# Altium PCB di2c.PcbDoc
Units mil, origin at the board's own origin, x right, y up, seen from the top; angles counter-clockwise.
Board outline 1945 x 875 mil, 2 copper layers (Top Layer, Bottom Layer); 28 components, 18 nets, 90 pads, 13 vias.
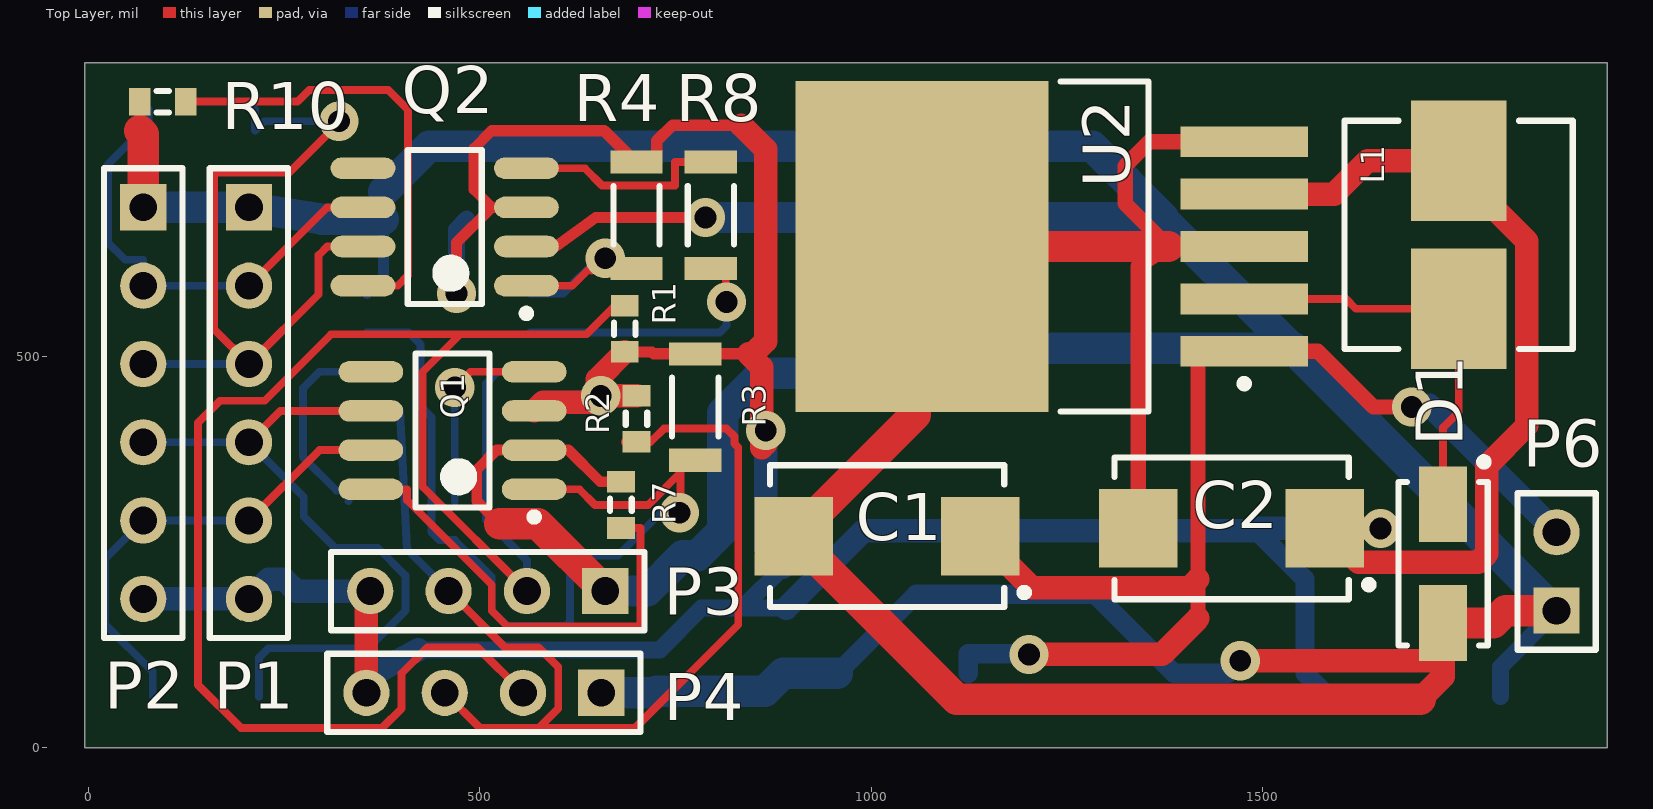
[diagram p0: Top Layer view]
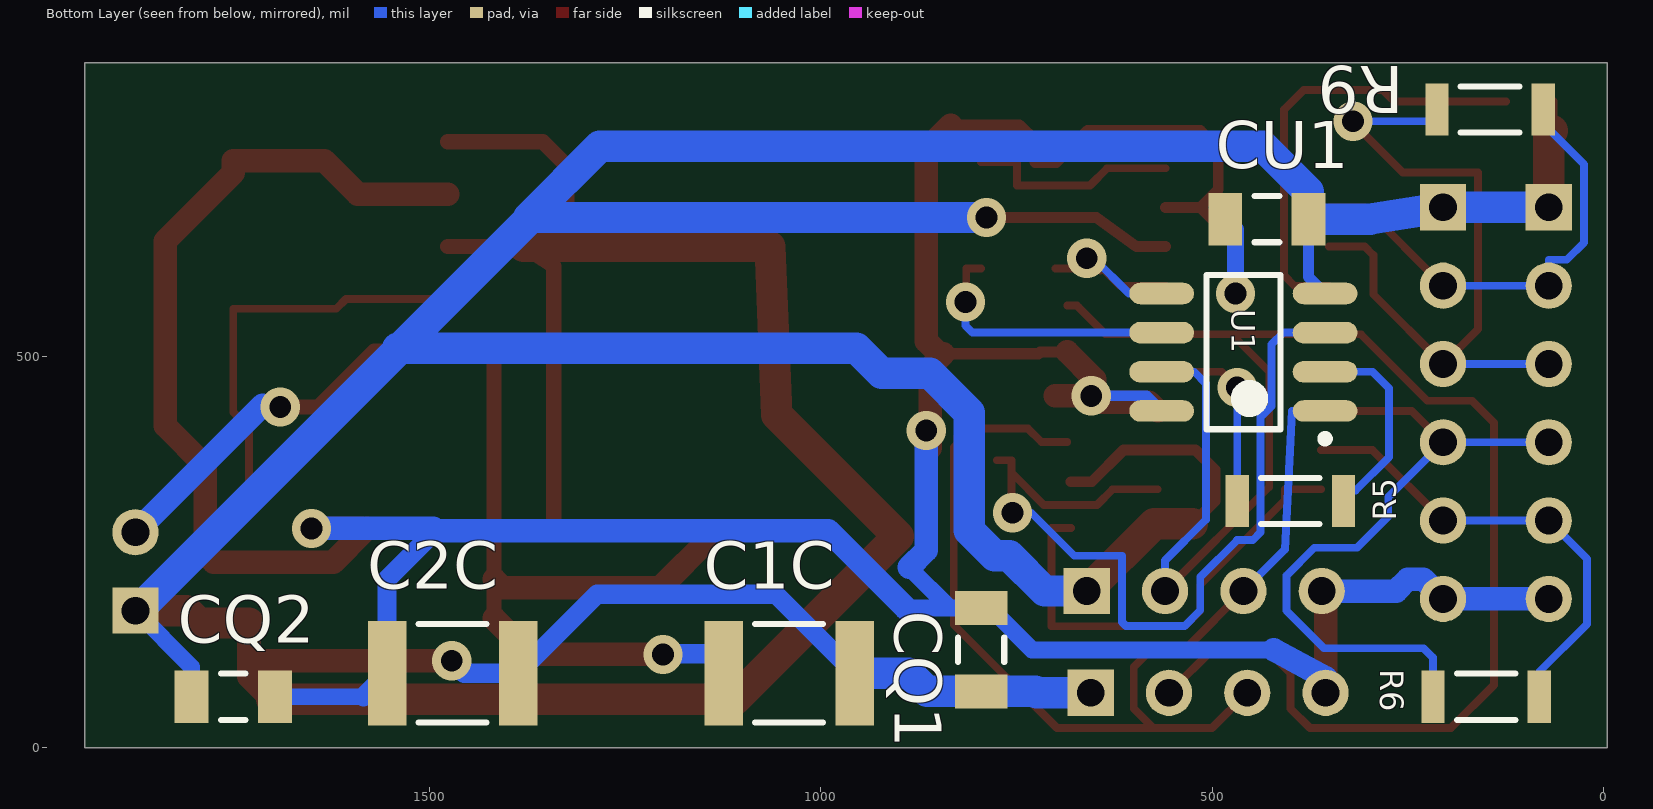
[diagram p1: Bottom Layer view, seen from below]

## Layer stack, top to bottom
Top Solder: solder mask 0.4, Solder Resist, Dk 3.5
Top Layer: signal copper 1.4
Dielectric 1: dielectric 12.6, FR-4, Dk 4.8
Bottom Layer: signal copper 1.4
Bottom Solder: solder mask 0.4, Solder Resist, Dk 3.5

## Board outline
-5,0 -5,875 1940,875 1940,0

## Design rules (kind name [scope] priority, off if disabled: settings)
Clearance [All] p1: gap=10
PolygonConnect [All] p1: connectstyle=Relief reliefconductorwidth=10 reliefentries=4 polygonreliefangle="90 Angle" airgapwidth=10
RoutingVias [All] p1: holewidth=28 width=50 viastyle="Through Hole" minholewidth=28 minwidth=50 maxholewidth=28 maxwidth=50
SilkToSolderMaskClearance SilkToSolderMaskClearance_1 [IsPad vs HasFootprint('J1-0603')] p1: minsilkscreentomaskgap=3.5 clearancetoexposedcopper=TRUE
SilkToSolderMaskClearance [IsPad] p2: minsilkscreentomaskgap=10 clearancetoexposedcopper=TRUE
SolderMaskExpansion [All] p1: expansion=4
Width Width_4 [InNet('12V')] p1: maxlimit=60 minlimit=10 preferedwidth=30 minimp=50.000000 maximp=50.000000 favimp=50.000000
Width Width_3 [InNet('5V')] p2: maxlimit=60 minlimit=10 preferedwidth=30 minimp=50.000000 maximp=50.000000 favimp=50.000000
Width Width_2 [InNet('GND')] p3: maxlimit=50 minlimit=10 preferedwidth=40 minimp=50.000000 maximp=50.000000 favimp=50.000000
Width [All] p4: maxlimit=10 minlimit=10 preferedwidth=10
Width Width_1 [InNetClass('hc')] p5: maxlimit=30 minlimit=10 preferedwidth=20 minimp=50.000000 maximp=50.000000 favimp=50.000000
29 further rules are at their usual default settings.

## Classes and differential pairs
net class hc: 5V NetD1_1 NetP1_2 NetP1_3 NetP1_4 NetP1_5 NetQ1_1 NetQ1_4 NetQ2_1 NetQ2_4 NetR5_2 NetR8_2

## Components (designator, comment, footprint, x,y, rotation, side; value= is the part's Value field where it differs from the comment)
C1 "Cap Pol1" C7343 1020,270 r180 top
C1C "Cap Semi" C1812 1040,95 r0 bottom
C2 "Cap Pol1" C7343 1460,280 r180 top
C2C "Cap Semi" C1812 1470,95 r0 bottom
CQ1 "Cap Semi" C1206 795,125 r90 bottom
CQ2 "Cap Semi" C1206 1750,65 r180 bottom
CU1 "Cap Semi" C1206 430,675 r0 bottom
D1 "1N5819" DO214AC 1730,235 r270 top
L1 "Inductor" CD74R 1750,655 r90 top
P1 "Header 6" HDR1X6 205,690 r270 top
P2 "Header 6" HDR1X6 70,690 r270 top
P3 "Header 4" HDR1X4 660,200 r180 top
P4 "Header 4" HDR1X4 655,70 r180 top
P6 "Header 2" HDR1X2 1875,175 r90 top
Q1 "PCA82C251" SOIC150-8_M 465,405 r180 top
Q2 "PCA82C251" SOIC150-8_M 455,665 r180 top
R1 "Res3" J1-0603 685,535 r270 top
R2 "Res3" J1-0603 700,420 r90 top
R3 "270" R1206 775,435 r90 top
R4 "270" R1206 700,680 r90 top
R5 "60" R1206 400,315 r180 bottom
R6 "120" R1206 150,65 r180 bottom
R7 "Res3" J1-0603 680,310 r90 top
R8 "60" R1206 795,680 r270 top
R9 "120" R1206 145,815 r0 bottom
R10 "Res3" J1-0603 95,825 r180 top
U1 "PCA9600D" SOIC150-8_M 460,505 r0 bottom
U2 "LM2575" KTT 1230,640 r180 top

## Footprints (in the part's own frame and the unit in brackets; to place one, negate y for a bottom-side part, rotate by r counter-clockwise, add the part's x,y. Pads: shape width x height; smd on the part's side, far side on the other; paste and mask are expansions set on the pad)
C1206 [mm] "Chip Capacitor, Body 3.2x1.6mm, IPC High Density"
  rect 1.1x1.7 smd: 1(-1.35,0) 2(1.35,0)
  silkscreen extent -0.4,-0.75 0.4,0.75, body extent -1.7,-0.9 1.7,0.9, height 1.3
C1812 [mm] "Chip Capacitor, 2-Leads, Body 4.50x3.20mm, IPC Medium Density"
  rect 1.25x3.4 smd: 1(-2.125,0) 2(2.125,0)
  silkscreen extent -1.1,-1.6 1.1,1.6, body extent -2.4,-1.7 2.4,1.7, height 3
C7343 [mm]
  rect 2.55x2.55 smd: 1(-3.025,0) 2(3.025,0)
  silkscreen extent -4.58,-2.3 3.8,2.3, body extent -3.8,-2.3 3.8,2.3, height 4.3
CD74R [mm]
  rect 3.9x3.1 smd: 1(-2.4,0) 2(2.4,0)
  silkscreen extent -3.7,-3.7 3.7,3.7, body extent -3.7,-3.7 3.7,3.7, height 4
DO214AC [mm] "Molded Diode, 2-Leads, Body 5.00x2.70mm, IPC Medium Density"
  rect 2.45x1.55 smd: 1(-1.925,0) 2(1.925,0)
  silkscreen extent -3.42,-1.45 2.65,1.45, body extent -2.65,-1.45 2.65,1.45, height 2.45
HDR1X2 [mm] "Connector; Header; 2 Position"
  rect 1.5x1.5 hole 0.9: 1(0,0)
  round 1.5 hole 0.9: 2(2.54,0)
  silkscreen extent -1.27,-1.27 3.81,1.27
HDR1X4 [mm] "Connector; Header; 4 Position"
  rect 1.5x1.5 hole 0.9: 1(0,0)
  round 1.5 hole 0.9: 2(2.54,0) 3(5.08,0) 4(7.62,0)
  silkscreen extent -1.27,-1.27 8.89,1.27
HDR1X6 [mm] "Connector; Header; 6 Position"
  rect 1.5x1.5 hole 0.9: 1(0,0)
  round 1.5 hole 0.9: 2(2.54,0) 3(5.08,0) 4(7.62,0) 5(10.16,0) 6(12.7,0)
  silkscreen extent -1.27,-1.27 13.97,1.27
J1-0603 [mm] "Chip Resistor, Body 1.6x0.8mm, IPC High Density"
  rect 0.7x0.9 smd: 1(-0.75,0) 2(0.75,0)
  silkscreen extent -0.2,-0.35 0.2,0.35, body extent -0.85,-0.48 0.85,0.48, height 0.9
KTT [mm] "D2-PAK, 6-Pads, Body 7.93x8.69mm (max), IPC Medium Density"
  rect 4.15x1 smd: 1(-6.25,3.4) 2(-6.25,1.7) 3(-6.25,0) 4(-6.25,-1.7) 5(-6.25,-3.4)
  rect 8.2x10.75 smd: 6(4.2,0)
  silkscreen extent -6.38,-5.35 -0.3,5.35, body extent -3.15,-5.32 6.5,5.33, height 4.83
R1206 [mm] "Chip Resistor, 2-Leads, Body 3.20x1.60mm, IPC Medium Density"
  rect 0.75x1.7 smd: 1(-1.725,0) 2(1.725,0)
  silkscreen extent -0.95,-0.75 0.95,0.75, body extent -1.6,-0.8 1.6,0.8, height 0.6
SOIC150-8_M [mm] "8-Pin Plastic Narrow Body Small Outline Integrated Circuit 1.27 mm Pitch, IPC Low Density"
  oval 2.1x0.7 smd: 1(-2.65,1.905) 2(-2.65,0.635) 3(-2.65,-0.635) 4(-2.65,-1.905) 5(2.65,-1.905) 6(2.65,-0.635) 7(2.65,0.635) 8(2.65,1.905)
  silkscreen extent -2.78,-2.5 1.2,2.93, body extent -2,-2.5 2,2.5, height 1.76

## Part data
C1 C2: "Polarized Capacitor (Radial)"
C1C C2C CQ1 CQ2 CU1: "Capacitor (Semiconductor SIM Model)"
D1: library part "D Zener", "Zener Diode"
P1 P2: "Header, 6-Pin"
P3 P4: "Header, 4-Pin"
P6: "Header, 2-Pin"
R1 R2 R7 R10: "Resistor"
R3 R4 R5 R6 R8 R9: library part Res3, "Resistor"
U1: library part P82B96

## Via types
v1: diameter 50, hole 28, Top Layer to Bottom Layer, 13 vias

## Nets (pads, with @x,y where several pads share a name; then routed paths per layer and width w, separated by ;. In a path a pad name is that pad's centre, name@x,y a point inside that pad or via, vN(x,y) a via of type N, cw(c..) or ccw(c..) an arc to the next point about the centre after c; other vN are vias at no path point)
5V: C2.1 C2C.2 CQ1.2 CQ2.2 CU1.2 L1.2 P1.6 P2.6 P3.4 P4.4 Q1.3 Q2.3 R1.2 R2.2 R3.2 R4.2 U1.8 U2.4 | length 5288.3
  Top Layer w13.78: v1(470,580) 470,645 515,690 ; 515,788 492,765 492,713 515,690 ; Q2.3 515,690 ; v1@650,449.53 653.46,449.53 v1@654.53,449.53 ; R1.2 719.44,505.47 722,502.91
  Top Layer w14.76: 515,788 658.91,788 699,747.91 R4.2 726,747.91 726,775 746,795 834,795 ; 722,502.91 R3.2 843,502.91 848.59,502.91
  Top Layer w30: P4.4 355,184.53 360,184.53 P3.4 ; Q1.3 580.55,441.22 v1@640.51,441.22 ; v1@649.33,450.67 v1@650,451.34 ; v1@650,449.53 v1@650,451.34 ; v1(654.33,449.33) 653.66,449.33 653.46,449.53 650.83,452.17 v1@650,451.34 ; v1@654.53,449.53 R2.2 ; R1.2 650,470.47 v1@650,451.34 ; 834,795 865,764 865,519.32 848.59,502.91 ; 843,502.91 860,485.91 860,383 865,388 v1(865,405) ; U2.4 1591,706.93 1633.56,749.49 L1.2 1750,734 1837,647 1837,411 1786,360 1786,248 1775,237 1622.09,237 C2.1@1582.09,277 ; C2.1 C2.1@1582.09,277 ; v1(1650,280) 1585.09,280 C2.1@1582.09,277
  Bottom Layer w13.78: U1.8 583.66,449.33 v1(654.33,449.33)
  Bottom Layer w21.65: 421,125 729.85,125 783,178.15 CQ1.2 835,178.15 ; v1(470,580) 470,661.85 CU1.2 ; 887,230.15 835,178.15 ; 891.01,178.15 835,178.15 ; 1583.66,65 CQ2.2
  Bottom Layer w24.61: 1491.66,277 1553.66,215 C2C.2 1583.66,65
  Bottom Layer w30: P2.6 P1.6 230,215 250,215 265,200 P3.4 ; P4.4 355,89 421,125 ; v1(865,405) 865,252.15 887,230.15 ; 891.01,178.15 989.86,277 1491.66,277 1494.66,280 v1(1650,280)
12V: C1.1 C1C.2 P6.2 U2.1 | length 1544.6
  Top Layer w19.68: 1417,165 1417,215 1417,506.14 U2.1 1570,506.14 1641.14,435 v1(1690,435)
  Top Layer w30: C1.1 1205.09,204 1406,204 1417,215 ; v1(1201,119) 1371,119 1417,165
  Bottom Layer w24.61: C1C.2 1123.66,120 1200,120 v1(1201,119)
  Bottom Layer w30: v1(1690,435) 1710,435 1712.5,437.5 P6.2
GND: C1.2 C1C.1 C2.2 C2C.1 CQ1.1 CQ2.1 CU1.1 D1.2 P1.1 P2.1 P3.1 P4.1 P6.1 Q1.2 Q2.2 R7.2 R10.2 U1.4 U2.3 U2.5 U2.6 | length 8717.4
  Top Layer w13.78: 65.47,788 R10.2 ; 525,286 496,315 496,355 521,380 Q1.2 613.07,380 653.54,339.53 R7.2 ; Q2.2 596.64,640 648,677 v1(788,677)
  Top Layer w19.68: C2.2 1340.91,615 1379,640 ; U2.3 1379,640 ; U2.5 1355,773.86 1324,742.86 1324,695 1379,640
  Top Layer w30.51: v1(1471,111) D1.2@1730,111 ; 1701,62 1730,91 D1.2@1730,111 ; D1.2 D1.2@1730,111
  Top Layer w40: 65.47,788 70,783.47 P2.1 ; 525,286 574,286 P3.1 ; 1379,640 U2.6 1055.91,425 C1.2 1108.91,62 1701,62 ; D1.2 1794,159.21 1809.79,175 P6.1
  Bottom Layer w13.78: U1.4 376.85,601.18 CU1.1
  Bottom Layer w21.65: CU1.1 376.85,709.85 ; CQ2.1 1803.15,103.15 P6.1
  Bottom Layer w24.61: C1C.1 1057.34,196 1285.34,196 C2C.1 1455,95 v1(1471,111)
  Bottom Layer w40: P2.1 P1.1 298,675 CU1.1 ; 376.85,709.85 435,768 1282,768 1373,677 ; P4.1 724,70 725.85,71.85 CQ1.1 864,71.85 887.15,95 C1C.1 ; P3.1 714,200 759,245 777.78,245 810,277.22 810,427.78 860.34,478.13 922.13,478.13 954,510 1540,510 ; v1(788,677) 1373,677 ; P6.1 1872.22,175 1373,674.22 1373,677
NetD1_1: D1.1 L1.1 U2.2 | length 537.1
  Top Layer w10: U2.2 1606,573.07 1618.56,560.51 L1.1 1750,428.74 1730,408.74 D1.1
NetP1_2: P1.2 P2.2 Q2.6 R9.1 | length 600.8
  Top Layer w10: P1.2 305,690 Q2.6
  Bottom Layer w10: R9.1 77.09,797 25,744.91 25,645 47,623 70,623 P2.2 P1.2
NetP1_3: P1.3 P2.3 Q2.7 R9.2 | length 961.9
  Top Layer w10: v1(320,800) 320,798 256.53,734.53 160.47,734.53 160.47,534.53 P1.3 294,579 294,629 305,640 Q2.7
  Bottom Layer w10: P2.3 P1.3 ; R9.2 212.91,788 224.91,800 v1(320,800)
NetP1_4: P1.4 P2.4 Q1.6 R6.1 | length 898.9
  Top Layer w10: P1.4 245,430 Q1.6
  Bottom Layer w10: P2.4 P1.4 275,320 275,295.24 315,255.24 369.44,255.24 405,219.68 405,175 357,127 229.91,127 217.91,115 R6.1
NetP1_5: P1.5 P2.5 Q1.7 R6.2 | length 598.5
  Top Layer w10: P1.5 295,380 Q1.7
  Bottom Layer w10: R6.2 82.09,96.91 21,158 21,241 P2.5 P1.5
NetQ1_1: Q1.1 R3.1 U1.3 | length 1119.5
  Top Layer w10: Q1.1 627,330 647,310 715,310 756,351 ; v1(755,300) 756,301 756,351 ; R3.1 756,367.09 756,351
  Bottom Layer w10: U1.3 409,530 424,515 424,436 438.15,421.85 438.15,275 448.15,265 468,265 515,218 515,175.47 535,155.47 610,155.47 615,160.47 615,245 676,245 731,300 v1(755,300)
NetQ1_4: Q1.4 R5.1 | length 254.7
  Top Layer w10: v1(467.91,460) 487.91,480 Q1.4
  Bottom Layer w10: R5.1 v1(467.91,460)
NetQ1_8: Q1.8 R7.1 | length 594.8
  Top Layer w10: Q1.8 407,330 407,315.97 515,207.97 515,175 535,155 705,155 705,280.47 R7.1
NetQ2_1: Q2.1 R4.1 U1.5 | length 291.7
  Top Layer w10: Q2.1 618,590 v1@640.09,612.09 ; v1(660,625) 658.48,625 642.83,609.34 v1@640.09,612.09 ; R4.1 v1@640.09,612.09
  Bottom Layer w10: U1.5 606,580 651,625 v1(660,625)
NetQ2_4: Q2.4 R8.1 | length 274.7
  Top Layer w10: Q2.4 634,740 656,718 749,718 749,747.91 R8.1
NetQ2_8: Q2.8 R10.1 | length 574.8
  Top Layer w10: R10.1 267,825 282,840 383,840 408,815 408,603 395,590 Q2.8
NetR5_2: R5.2 U1.2 | length 267.3
  Bottom Layer w10: R5.2 332.09,328 317,328 274,371 274,459 295,480 U1.2
NetR8_2: R8.2 U1.6 | length 346.9
  Top Layer w10: R8.2 814,612.09 814,570 v1(815,569)
  Bottom Layer w10: U1.6 806,530 815,539 v1(815,569)
SCL: P3.2 P4.2 R1.1 U1.7 | length 2224.9
  Top Layer w10: P4.2 497,128 433,128 400,95 400,50 375,25 195,25 140,80 140,415 168,443 225,443 310,528 475,528 ; P3.2 427,333 427,480 475,528 ; R1.1 672.53,564.53 670,562 636,528 475,528
  Bottom Layer w10: P3.2 560,238.94 507.91,291.02 507.91,465 522.91,480 U1.7
SDA: P3.3 P4.3 R2.1 U1.1 | length 1405.1
  Top Layer w10: P4.3 500,25 575,25 ; P3.3 532,128 575,128 600,103 600,50 575,25 ; R2.1@685,390.47 718,390.47 735,407.47 815,407.47 825,397.47 825,388.43 830,383.43 830,157 698,25 575,25
  Bottom Layer w10: U1.1 398,430 407,253 P3.3
pads on no net: Q1.5 Q2.5

## Silkscreen, mask and mechanical layers (free items; w line width, h text height)
Mechanical 1:
  lines w47.24: -28.62,0 ccw(c-5,0) -5,-23.62 ; -28.62,0 ccw(c-5,0) -5,-23.62 ; -28.62,0 -28.62,875 ; -28.62,875 cw(c-5,875) -5,898.62 ; -28.62,875 cw(c-5,875) -5,898.62 ; -5,-23.62 1940,-23.62 ; -5,898.62 1940,898.62 ; 1940,-23.62 ccw(c1940,0) 1963.62,0 ; 1940,-23.62 ccw(c1940,0) 1963.62,0 ; 1940,898.62 cw(c1940,875) 1963.62,875 ; 1940,898.62 cw(c1940,875) 1963.62,875 ; 1963.62,0 1963.62,875